# EAGLE board air_quality (EAGLE 6.5.0)
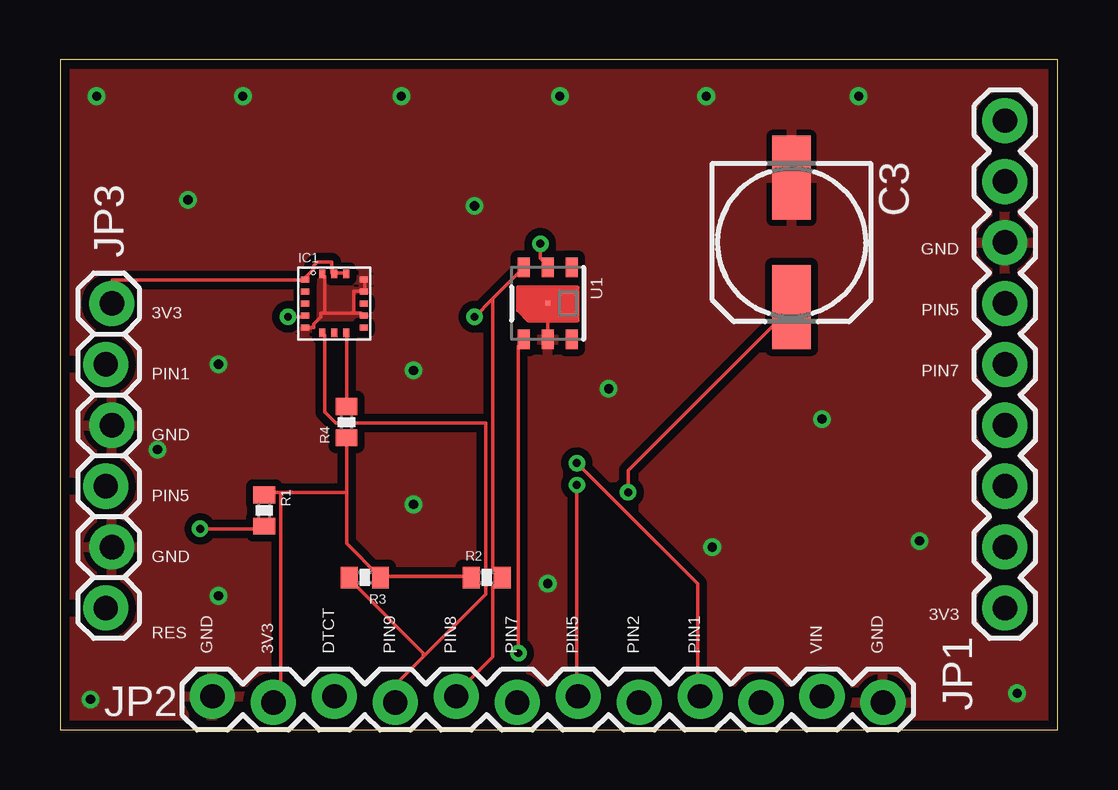
[diagram p0: board, top side]
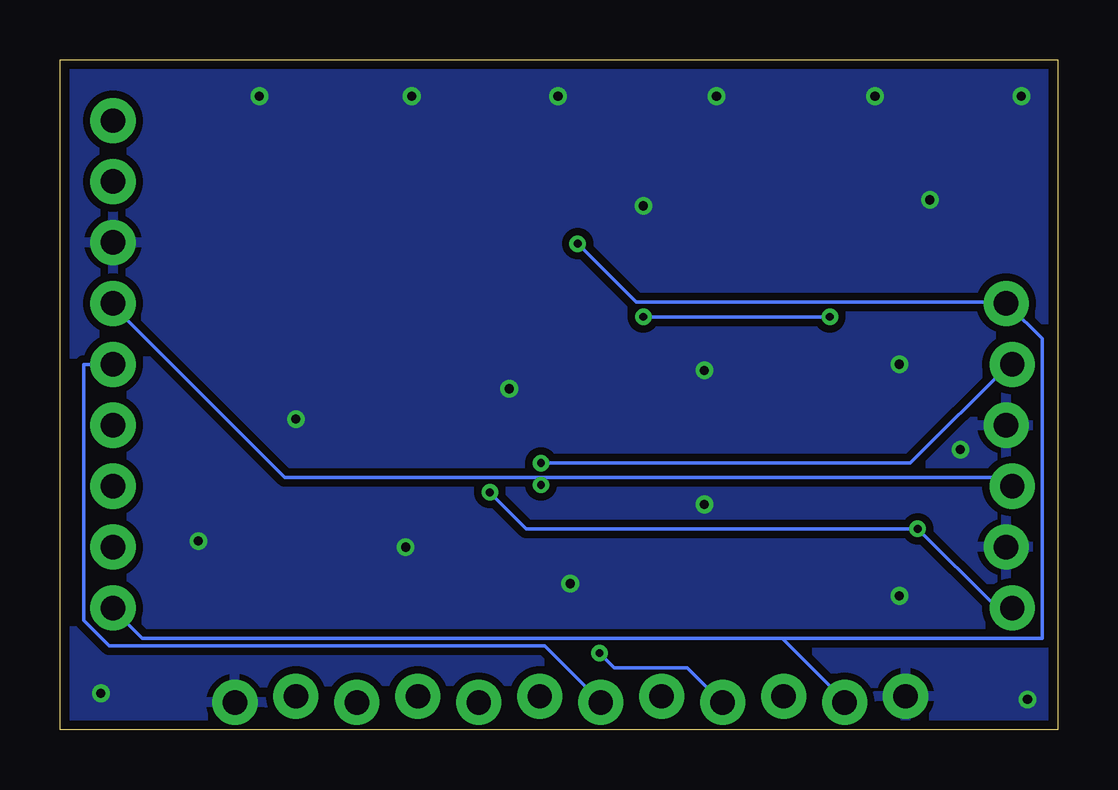
[diagram p1: board, bottom side, seen from below]

Size 41.58 x 27.93 mm. Coordinates in mm from the lower left corner, seen from the top.
Outline: 0,0 41.58,0 41.58,27.93 0,27.93 0,0
Copper layers (1*16): Top 0.0356mm / dielectric 1.5011mm / Bottom 0.0356mm
Design rules "LaenPCBOrder *": minimum track width 6mil, minimum drill 13mil, track to track 6mil, track to pad 6mil, pad to pad 6mil, via to via 6mil, smd to smd 6mil, copper to edge 15mil, drill to drill 6mil, minimum pad ring 7mil, minimum via ring 7mil, stop-mask expansion 3mil, vias tented up to drill 15mil, thermal gap 10mil

## Footprints (pad centres in the part's own frame; a part is rotated, then mirrored left to right if it is on the bottom)
153CLV-0605 = smd 3.5 x 1.6: + 2.7,0; - -2.7,0
HCLGA-16L = smd 0.35 x 0.25: 1 -1.225,1; 2 -1.225,0.5; 3 -1.225,0; 4 -1.225,-0.5; 5 -1.225,-1; 9 1.225,-1; 10 1.225,-0.5; 11 1.225,0; 12 1.225,0.5; 13 1.225,1 | smd 0.25 x 0.35: 6 -0.5,-1.225; 7 0,-1.225; 8 0.5,-1.225; 14 0.5,1.225; 15 0,1.225; 16 -0.5,1.225
1X09 = drill 1.016 pad 1.88: 1 0,0; 2 2.54,0; 3 5.08,0; 4 7.62,0; 5 10.16,0; 6 12.7,0; 7 15.24,0; 8 17.78,0; 9 20.32,0
1X12_LOCK = drill 1.016 pad 1.88: 1 0,0.127; 2 2.54,-0.127; 3 5.08,0.127; 4 7.62,-0.127; 5 10.16,0.127; 6 12.7,-0.127; 7 15.24,0.127; 8 17.78,-0.127; 9 20.32,0.127; 10 22.86,-0.127; 11 25.4,0.127; 12 27.94,-0.127
1X06_LOCK = drill 1.016 pad 1.88: 1 0,0; 2 2.54,-0.254; 3 5.08,0; 4 7.62,-0.254; 5 10.16,0; 6 12.7,-0.254
0402-RES = smd 0.7 x 0.9: 1 -0.65,0; 2 0.65,0
HTU21D = smd 0.2 x 0.2: 7 0,0 | smd 0.8 x 0.5: DATA 1.5,-1; GND 1.5,0; NC@1 -1.5,1; NC@6 1.5,1; SCK -1.5,-1; VDD -1.5,0

## Placement (x,y rotation side)
C3  220uF 16V .248 dia  [153CLV-0605]  30.48,20.32 270 top
IC1  LPS331AP  [HCLGA-16L]  11.43,17.78 0 top
JP1  M09  [1X09]  39.37,25.4 270 top
JP2  M12LOCK  [1X12_LOCK]  6.35,1.27 0 top
JP3  [1X06_LOCK]  1.91,5.08 90 top
R1  150Ohm  [0402-RES]  8.51,9.14 270 top
R2  4.7KOhm  [0402-RES]  17.78,6.35 0 top
R3  4.7KOhm  [0402-RES]  12.7,6.35 180 top
R4  4.7KOhm  [0402-RES]  11.94,12.83 90 top
U1  HTU21DSMD  [HTU21D]  20.32,17.78 270 top

## Library data of the parts
C3 = rcl
IC1 = LPS331AP
JP1-JP3 = SparkFun-Connectors
R1-R4 = SparkFun-Passives
U1 = SparkFun-Sensors

## Nets
3V3: IC1.1 IC1.14 IC1.15 JP1.9 JP2.2 JP3.6 R1.1 R2.1 R3.1 R4.1 U1.VDD
CS: IC1.8 R4.2
DTCT: JP2.3
GND: C3.- IC1.5 IC1.10 IC1.12 IC1.13 IC1.16 JP1.3 JP2.1 JP2.12 JP3.2 JP3.4 U1.7 U1.GND
PIN1: JP2.9 JP3.5
PIN2: JP2.8
PIN5: JP1.4 JP2.7 JP3.3
PIN7: JP1.5 JP2.6
PIN8: IC1.4 JP2.5 R2.2 U1.SCK
PIN9: IC1.6 JP2.4 R3.2 U1.DATA
RES: C3.+ JP3.1 R1.2
VIN: JP2.11

## Tracks (layer width: path | path; a pad name or v marks a point on that pad's centre or on a via)
3V3  (via drill 0.33)
  Top 0.152: IC1.14 11.94,19.05 11.48,19.05 IC1.15 11.33,19.05 11.33,19.51 10.72,19.51 10.57,19.36 10.57,19.2 10.26,18.9 IC1.1 10.11,18.75 2.18,18.75 2.18,17.83 JP3.6 | v20.02,20.27 20.02,19.66 20.32,19.36 U1.VDD | R2.1 17.12,6.4 13.46,6.4 R3.1 13.31,6.4 11.94,7.77 11.94,9.91 | 11.94,9.91 9.2,9.91 | 9.2,9.91 8.59,9.91 R1.1 | R4.1 11.94,9.91 | 9.2,9.91 9.2,1.52 8.89,1.22 JP2.2
  Bottom 0.152: v20.02,20.27 17.58,17.83 2.18,17.83 JP3.6 2.03,17.68 0.66,16.31 0.66,3.81 11.48,3.81 | 11.48,3.81 38.15,3.81 39.37,5.03 JP1.9 | 11.48,3.81 8.89,1.22 JP2.2
CS
  Top 0.152: R4.2 11.94,16.46 IC1.8
GND  (via drill 0.38)
  Top 0.152: 10.87,18.9 IC1.16 11.02,18.9 11.02,17.37 | U1.7 U1.GND | 2.18,12.65 JP3.4 2.18,12.8 | 6.3,1.52 JP2.1 | IC1.13 12.7,18.75 12.7,18.29 IC1.12 12.55,18.29 12.24,18.29 12.24,17.37 | 11.02,17.37 10.87,17.37 10.87,17.22 10.57,16.92 10.57,16.76 10.26,16.76 IC1.5 10.11,16.76 | 11.02,17.37 12.24,17.37 | 12.24,17.37 12.55,17.37 IC1.10 | 2.18,7.62 JP3.2
  other vias: 1.52,26.42 1.27,1.27 4.06,11.68 6.6,15.24 7.62,26.42 14.22,26.42 20.83,26.42 26.92,26.42 33.27,26.42 5.33,22.1 17.27,21.84 14.73,14.99 22.86,14.22 31.75,12.95 35.81,7.87 39.88,1.52 6.6,5.59 14.73,9.4 20.32,6.1 27.18,7.62
  pour Bottom (isolate 0.305): 0,0 41.66,0 41.66,27.94 0,27.94
  pour Top (isolate 0.305): 0,0 41.66,0 41.66,27.94 0,27.94
PIN1  (via drill 0.33)
  Top 0.152: v21.54,11.12 26.57,6.1 26.57,1.52 JP2.9
  Bottom 0.152: v21.54,11.12 6.15,11.12 2.03,15.24 JP3.5
PIN5  (via drill 0.33)
  Top 0.152: v21.54,10.21 21.54,1.52 JP2.7
  Bottom 0.152: 21.54,10.52 32.21,10.52 39.37,17.68 JP1.4 | 21.54,10.52 2.34,10.52 2.03,10.21 JP3.3 | 21.54,10.52 v21.54,10.21
PIN7
  Bottom 0.152: JP1.5 40.59,15.24 40.59,4.57 39.52,3.51 21.39,3.51 19.1,1.22 JP2.6
PIN8  (via drill 0.33)
  Top 0.152: 18.49,6.4 R2.2 | R2.2 18.34,6.25 18.03,5.94 18.03,3.05 16.51,1.52 JP2.5 | v9.5,17.22 10.11,17.22 IC1.4 | 18.03,17.98 19.25,19.2 U1.SCK | 18.03,17.98 v17.27,17.22 | 18.03,17.98 18.03,6.71 18.34,6.4 R2.2
  Bottom 0.152: 16.51,1.52 JP2.5 | v17.27,17.22 v9.5,17.22
PIN9  (via drill 0.33)
  Top 0.152: 13.61,1.52 13.92,1.22 JP2.4 13.61,1.52 | 13.61,1.52 15.14,3.05 | 15.14,3.05 17.73,5.64 17.73,12.8 11.48,12.8 11.02,13.26 11.02,16.46 IC1.6 | v19.1,3.2 19.1,16 19.25,16.15 U1.DATA | 15.14,3.05 15.14,3.2 12.09,6.25 R3.2
  Bottom 0.152: v19.1,3.2 18.49,2.59 15.44,2.59 14.07,1.22 JP2.4
RES  (via drill 0.33)
  Top 0.152: v5.84,8.38 8.43,8.38 R1.2 | v23.67,9.91 23.67,10.82 30.38,17.53 C3.+
  Bottom 0.152: 2.64,5.18 2.03,5.18 JP3.1 2.64,5.18 | 2.64,5.18 v5.84,8.38 22.15,8.38 v23.67,9.91

## Text on the board
tPlace: GND | PIN5 | 3V3 | PIN7 | PIN1 | GND | PIN5 | GND | 3V3 | RES | GND | 3V3 | DTCT | PIN9 | PIN8 | PIN7 | PIN5 | PIN2 | PIN1 | VIN | GND